# Altium PCB PCB2 - 副本.PcbDoc
Units mil, origin at the board's own origin, x right, y up, seen from the top; angles counter-clockwise.
Board outline 15000 x 6915 mil, 2 copper layers (Top Layer, Bottom Layer); 61 components, 138 nets, 441 pads, 73 vias.
Unrouted connection lines stored in the file: 80.
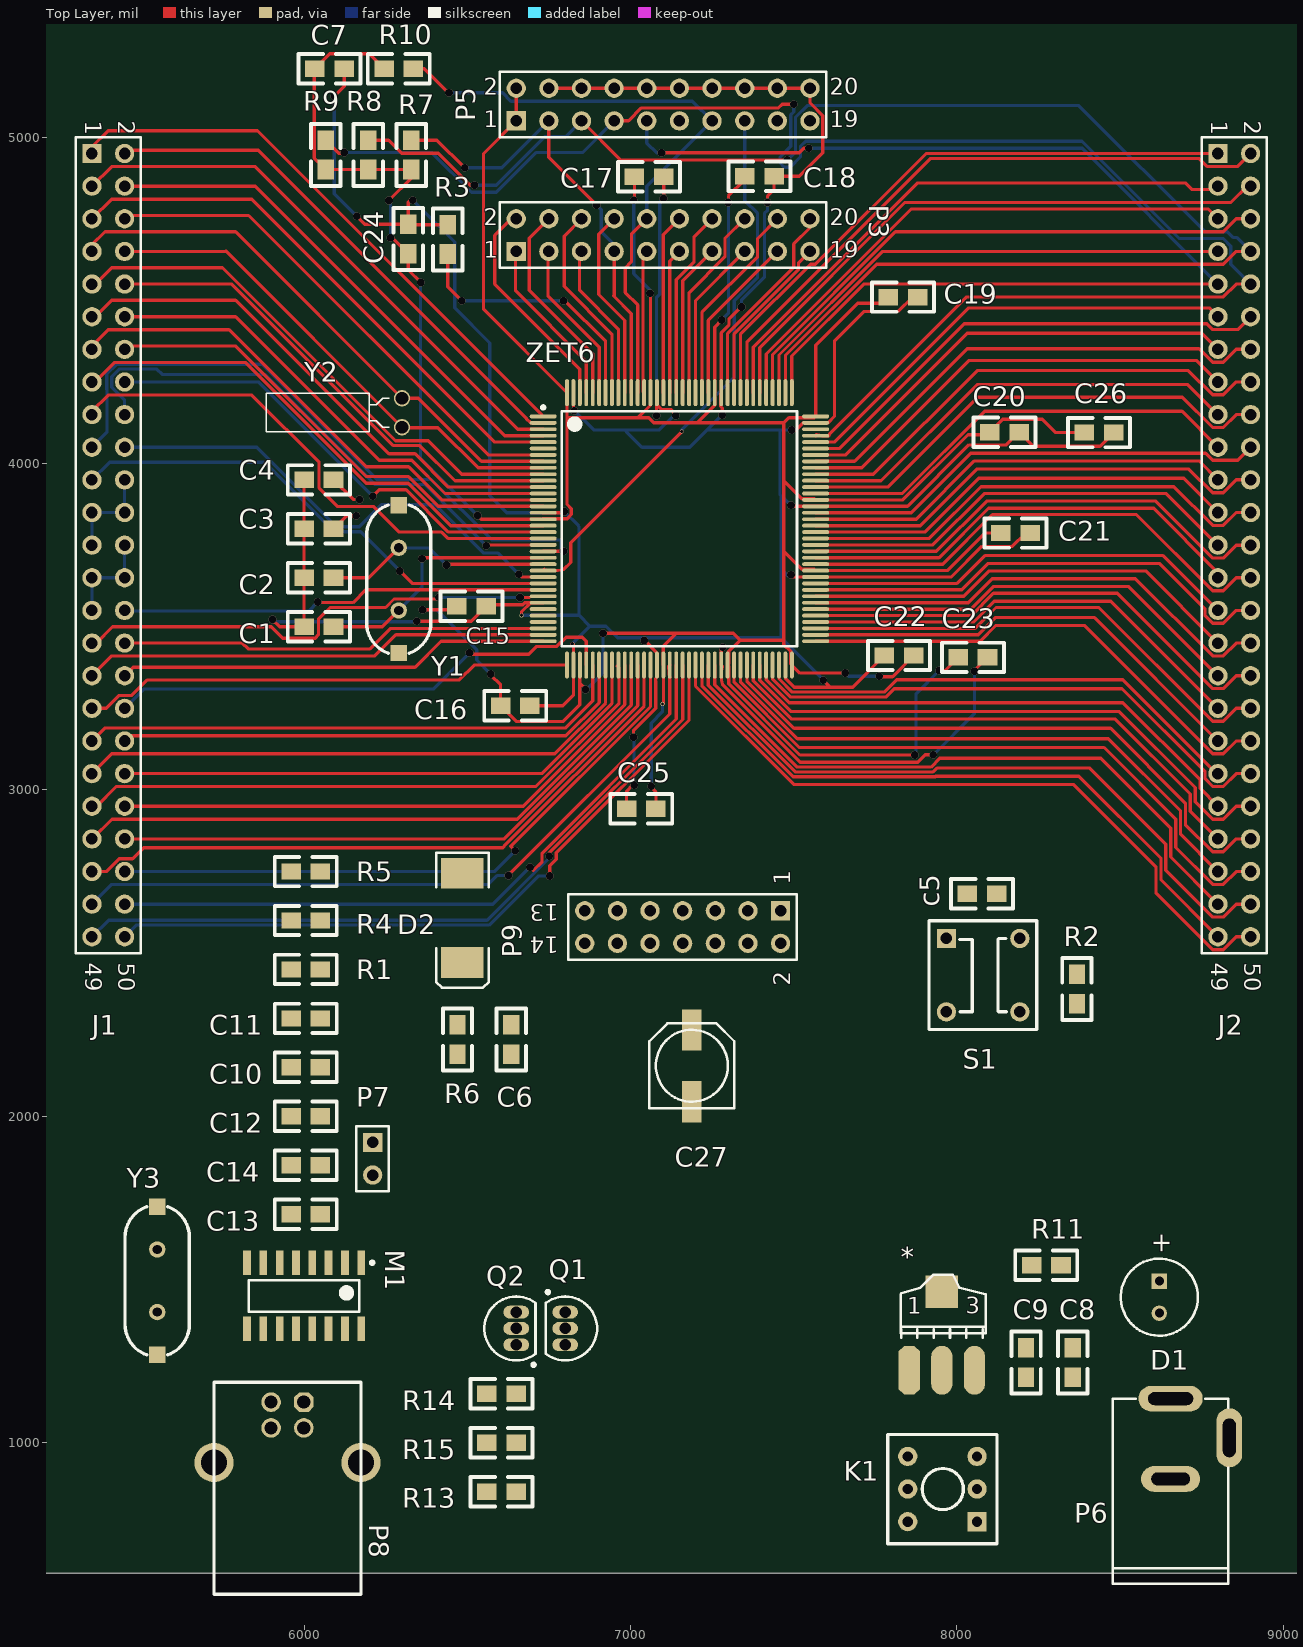
[diagram p0: Top Layer view]
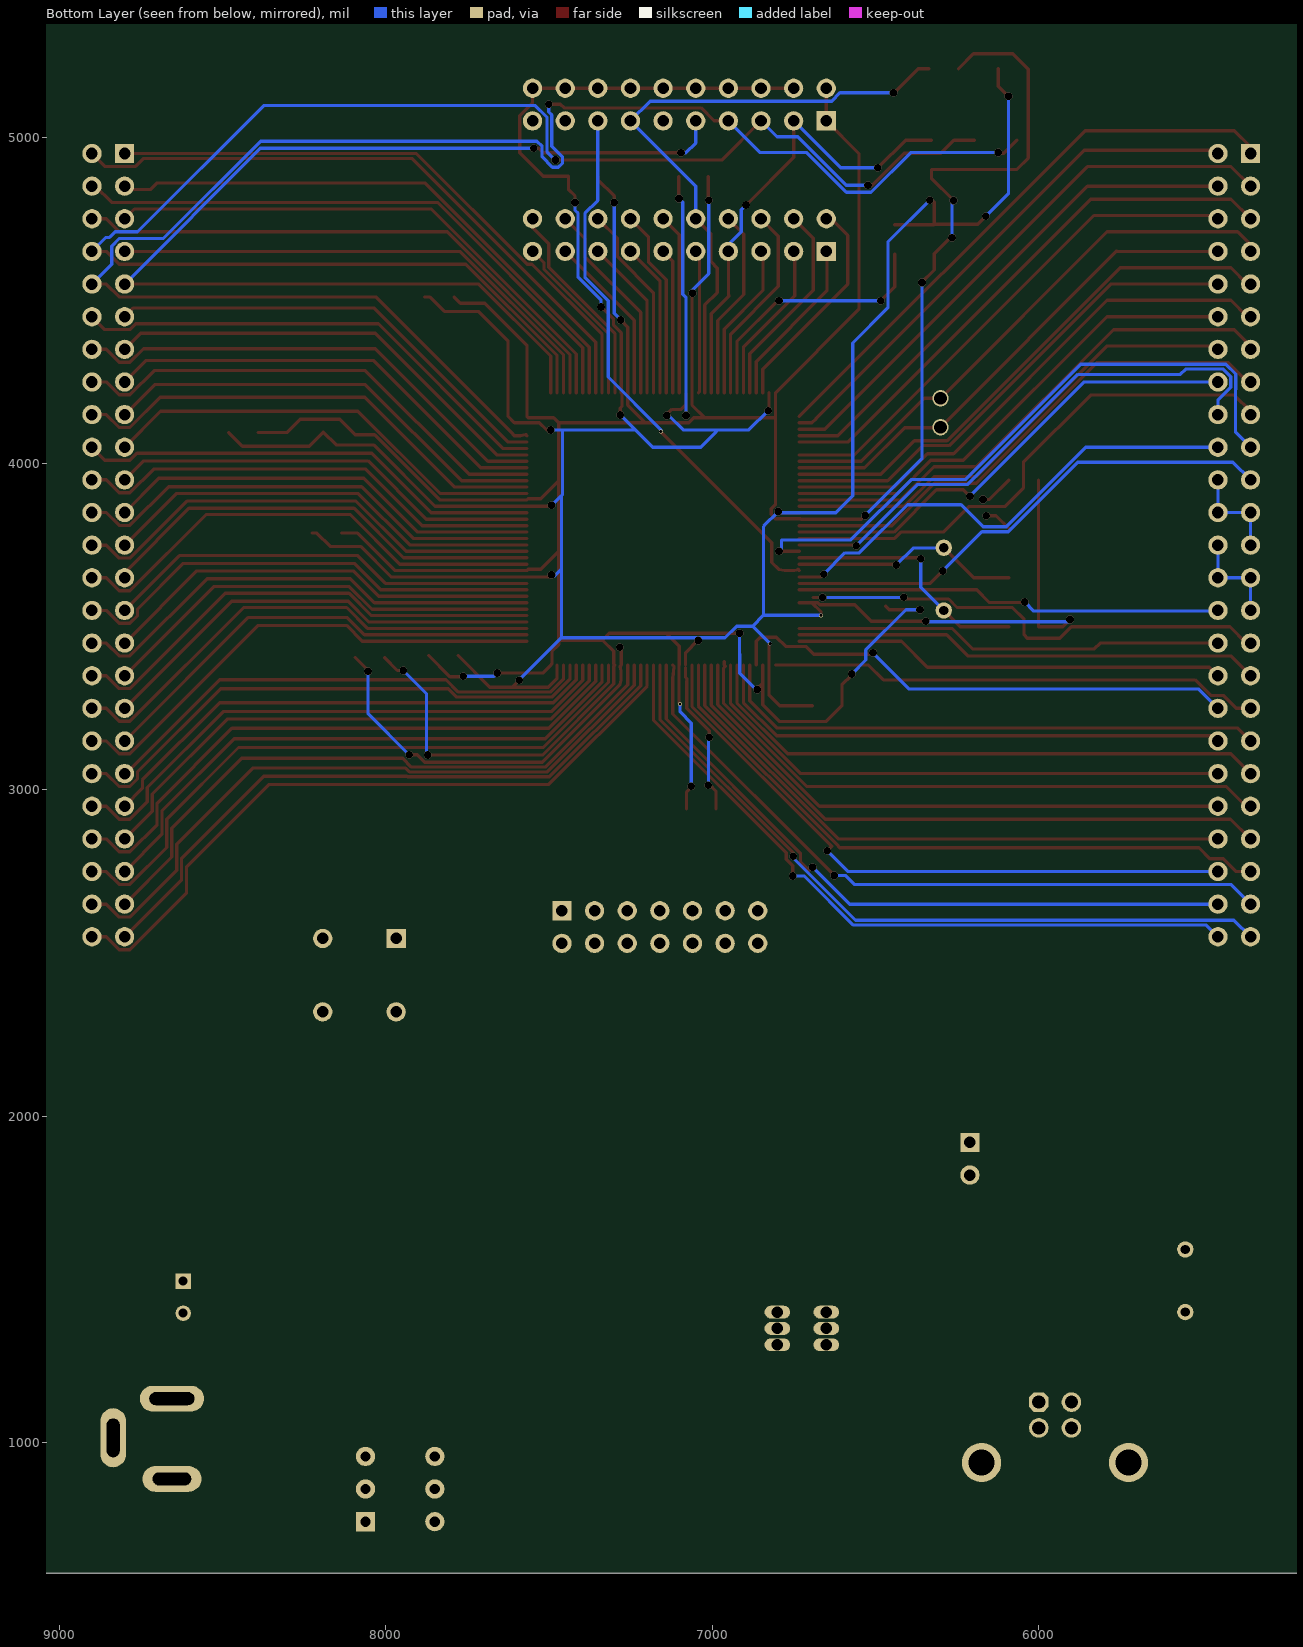
[diagram p1: Bottom Layer view, seen from below]

## Layer stack, top to bottom
Top Layer: signal copper 1.4
Dielectric: dielectric 12.6, FR-4, Dk 4.8
Bottom Layer: signal copper 1.4

## Board outline
35,7375 35,585 20,600 0,600 15000,600 15000,7500 0,7500

## Design rules (kind name [scope] priority, off if disabled: settings)
Clearance [All] p1: gap=5
PolygonConnect [All] p1: connectstyle=Relief reliefconductorwidth=10 reliefentries=4 polygonreliefangle="90 Angle" airgapwidth=10
RoutingVias [All] p1: holewidth=11 width=14 viastyle="Through Hole" minholewidth=10 minwidth=10 maxholewidth=28 maxwidth=50
SilkscreenOverComponentPads [All] p1: minsilkscreentomaskgap=10
SolderMaskExpansion [All] p1: expansion=4
Width [All] p1: maxlimit=10 minlimit=10 preferedwidth=10
27 further rules are at their usual default settings.

## Components (designator, comment, footprint, x,y, rotation, side; value= is the part's Value field where it differs from the comment)
* "ASM1117" AMS1117 7854,1222 r0 top
C1 "Cap" 0805 6000,3500 r0 top
C2 "Cap" 0805 6000,3650 r0 top
C3 "Cap" 0805 6000,3800 r0 top
C4 "Cap" 0805 6000,3950 r0 top
c5 "Cap" 0805 8122,2682 r180 top
C6 "Cap Semi" 0805 6634.94,2190 r90 top
C7 "Cap Semi" 0805 6123,5210 r180 top
C8 "Cap" 0805 8355,1201 r90 top
C9 "Cap" 0805 8212,1201 r90 top
C10 "Cap Semi" 0805 5960,2150 r0 top
C11 "Cap Semi" 0805 5960,2300 r0 top
C12 "Cap Semi" 0805 5960,2000 r0 top
C13 "Cap Semi" 0805 6050,1700 r180 top
C14 "Cap Semi" 0805 6050,1850 r180 top
C15 "Cap" 0805 6558,3563 r180 top
C16 "Cap" 0805 6692,3258 r180 top
C17 "Cap" 0805 7012,4879 r0 top
C18 "Cap" 0805 7440,4880 r180 top
C19 "Cap" 0805 7880,4510 r180 top
C20 "Cap" 0805 8191,4096 r180 top
C21 "Cap" 0805 8225,3787 r180 top
C22 "Cap" 0805 7778,3412 r0 top
C23 "Cap" 0805 8094,3406 r180 top
C24 "Cap" 0805 6319,4733 r270 top
C25 "Cap" 0805 6988,2942 r0 top
C26 "Cap" 0805 8481,4095 r180 top
C27 "Cap Pol1" CC6.56.5 7188,2155 r270 top
D1 "LED3" RB.1 8620,1495 r90 top
D2 "Diode" SMC 6485,2608 r270 top
J1 "Edge Con 50" HDR2X25 5350,4950 r270 top
J2 "Edge Con 50" HDR2X25 8800,4950 r270 top
K1 "BUTTON" BTN8.5*8.5 8062,758 r180 top
M1 "CH340" ch340 6000,1450 r270 top
P3 "Header 10X2H" HDR2X10 6650,4650 r0 top
P5 "download" HDR2X10 6650,5050 r0 top
P6 "PWR2.5" POWER_002 8655,1135 r0 top
P7 "Header 2" HDR1X2 6210,1920 r270 top
P8 "MiNiUSB" USB_B1 5999,1124 r270 top
P9 "Header 7X2" HDR2X7 7460,2630 r180 top
Q1 "2N3904" TO-92A 6800,1350 r180 top
Q2 "2N3904" TO-92A 6650,1350 r0 top
R1 "Res2" 0805 5960,2450 r0 top
R2 "Res2" 0805 8368,2345 r90 top
R3 "Res2" 0805 6440,4642 r90 top
R4 "Res2" 0805 5960,2600 r0 top
R5 "Res2" 0805 5960,2750 r0 top
R6 "Res2" 0805 6470,2190 r90 top
R7 "Res2" 0805 6328,4991 r270 top
R8 "Res2" 0805 6197,4991 r270 top
R9 "Res2" 0805 6066,4991 r270 top
R10 "Res2" 0805 6335,5210 r180 top
R11 "Res2" 0805 8229,1544 r0 top
R13 "Res2" 0805 6650,850 r180 top
R14 "Res2" 0805 6650,1150 r180 top
R15 "Res2" 0805 6650,1000 r180 top
S1 "SW-PB" key4 7968,2545 r270 top
Y1 "8MH" XTAL_US 6290,3550 r90 top
Y2 "32.76MH" XTAL4 6300,4200 r0 top
Y3 "12MHZ" XTAL_US 5550,1400 r90 top
ZET6 "MCU" LQFP144 7150,3800 r0 top

## Footprints (in the part's own frame and the unit in brackets; to place one, negate y for a bottom-side part, rotate by r counter-clockwise, add the part's x,y. Pads: shape width x height; smd on the part's side, far side on the other; paste and mask are expansions set on the pad)
0805 [mil]
  rect 60x50 smd: 1(0,-0.06) 2(90,-0.06)
  silkscreen extent -50,-45 140,45
AMS1117 [mil]
  oct 65x150 smd: 1(0.03,-0.06)
  oval 65x150 smd: 2(100.03,-0.06) 3(200.03,-0.06)
  rect 100x100 smd: 4(100.03,239.94)
  silkscreen extent -26,100 234,293
BTN8.5*8.5 [mm]
  rect 1.5x1.5 hole 0.8: 1(0,0)
  round 1.5 hole 0.8: 2(0,-2.54) 3(0,-5.08) 4(5.4,-5.08) 5(5.4,-2.54) 6(5.4,0)
  silkscreen extent -1.55,-6.79 6.95,1.71
CC6.56.5 [mm]
  rect 3.2x1.5 smd: 1(-2.794,0) 2(2.8,0)
  silkscreen extent -3.3,-3.3 3.3,3.3
ch340 [mm] "SOIC, 16-Leads, Body 8.6x4.0mm (max), Pitch 1.27mm, IPC Medium Density"
  rect 1.9x0.6 smd: 1(-2.575,4.445) 2(-2.575,3.175) 3(-2.575,1.905) 4(-2.575,0.635) 5(-2.575,-0.635) 6(-2.575,-1.905) 7(-2.575,-3.175) 8(-2.575,-4.445) 9(2.575,-4.445) 10(2.575,-3.175) 11(2.575,-1.905) 12(2.575,-0.635) 13(2.575,0.635) 14(2.575,1.905) 15(2.575,3.175) 16(2.575,4.445)
  silkscreen extent -2.7,-4.3 1.22,5.42, body extent -1.98,-4.28 1.97,4.28, height 1.7
HDR1X2 [mm] "Connector; Header; 2 Position"
  rect 1.5x1.5 hole 0.9: 1(0,0)
  round 1.5 hole 0.9: 2(2.54,0)
  silkscreen extent -1.27,-1.27 3.81,1.27
HDR2X7 [mm] "Connector; Header; 7x2 Position"
  rect 1.5x1.5 hole 0.9: 1(0,0)
  round 1.5 hole 0.9: 2(0,2.54) 3(2.54,0) 4(2.54,2.54) 5(5.08,0) 6(5.08,2.54) 7(7.62,0) 8(7.62,2.54) 9(10.16,0) 10(10.16,2.54) 11(12.7,0) 12(12.7,2.54) 13(15.24,0) 14(15.24,2.54)
  silkscreen extent -1.27,-1.27 16.51,3.81
HDR2X10 [mm] "Connector; Header; 10x2 Position"
  rect 1.5x1.5 hole 0.9: 1(0,0)
  round 1.5 hole 0.9: 2(0,2.54) 3(2.54,0) 4(2.54,2.54) 5(5.08,0) 6(5.08,2.54) 7(7.62,0) 8(7.62,2.54) 9(10.16,0) 10(10.16,2.54) 11(12.7,0) 12(12.7,2.54) 13(15.24,0) 14(15.24,2.54) 15(17.78,0) 16(17.78,2.54) 17(20.32,0) 18(20.32,2.54) 19(22.86,0) 20(22.86,2.54)
  silkscreen extent -1.27,-1.27 24.13,3.81
HDR2X25 [mm] "Connector; Header; 25x2 Position"
  rect 1.5x1.5 hole 0.9: 1(0,0)
  round 1.5 hole 0.9: 2(0,2.54) 3(2.54,0) 4(2.54,2.54) 5(5.08,0) 6(5.08,2.54) 7(7.62,0) 8(7.62,2.54) 9(10.16,0) 10(10.16,2.54) 11(12.7,0) 12(12.7,2.54) 13(15.24,0) 14(15.24,2.54) 15(17.78,0) 16(17.78,2.54) 17(20.32,0) 18(20.32,2.54) 19(22.86,0) 20(22.86,2.54) 21(25.4,0) 22(25.4,2.54) 23(27.94,0) 24(27.94,2.54) 25(30.48,0) 26(30.48,2.54) 27(33.02,0) 28(33.02,2.54) 29(35.56,0) 30(35.56,2.54) 31(38.1,0) 32(38.1,2.54) 33(40.64,0) 34(40.64,2.54) 35(43.18,0) 36(43.18,2.54) 37(45.72,0) 38(45.72,2.54) 39(48.26,0) 40(48.26,2.54) 41(50.8,0) 42(50.8,2.54) 43(53.34,0) 44(53.34,2.54) 45(55.88,0) 46(55.88,2.54) 47(58.42,0) 48(58.42,2.54) 49(60.96,0) 50(60.96,2.54)
  silkscreen extent -1.27,-1.27 62.23,3.81
key4 [mm]
  round 1.5 hole 0.9: 1(0,5.715) 3(5.715,0) 4(5.715,5.715)
  rect 1.5x1.5 hole 0.9: 2(0,0)
  silkscreen extent -1.37,-1.35 7.09,7.04
LQFP144 [mm] "144-Pin Thin Quad Flat Pack 0.5 mm Pitch, IPC Low Density"
  oval 2.1x0.3 smd: 1(-10.6,8.75) 2(-10.6,8.25) 3(-10.6,7.75) 4(-10.6,7.25) 5(-10.6,6.75) 6(-10.6,6.25) 7(-10.6,5.75) 8(-10.6,5.25) 9(-10.6,4.75) 10(-10.6,4.25) 11(-10.6,3.75) 12(-10.6,3.25) 13(-10.6,2.75) 14(-10.6,2.25) 15(-10.6,1.75) 16(-10.6,1.25) 17(-10.6,0.75) 18(-10.6,0.25) 19(-10.6,-0.25) 20(-10.6,-0.75) 21(-10.6,-1.25) 22(-10.6,-1.75) 23(-10.6,-2.25) 24(-10.6,-2.75) 25(-10.6,-3.25) 26(-10.6,-3.75) 27(-10.6,-4.25) 28(-10.6,-4.75) 29(-10.6,-5.25) 30(-10.6,-5.75) 31(-10.6,-6.25) 32(-10.6,-6.75) 33(-10.6,-7.25) 34(-10.6,-7.75) 35(-10.6,-8.25) 36(-10.6,-8.75) 73(10.6,-8.75) 74(10.6,-8.25) 75(10.6,-7.75) 76(10.6,-7.25) 77(10.6,-6.75) 78(10.6,-6.25) 79(10.6,-5.75) 80(10.6,-5.25) 81(10.6,-4.75) 82(10.6,-4.25) 83(10.6,-3.75) 84(10.6,-3.25) 85(10.6,-2.75) 86(10.6,-2.25) 87(10.6,-1.75) 88(10.6,-1.25) 89(10.6,-0.75) 90(10.6,-0.25) 91(10.6,0.25) 92(10.6,0.75) 93(10.6,1.25) 94(10.6,1.75) 95(10.6,2.25) 96(10.6,2.75) 97(10.6,3.25) 98(10.6,3.75) 99(10.6,4.25) 100(10.6,4.75) 101(10.6,5.25) 102(10.6,5.75) 103(10.6,6.25) 104(10.6,6.75) 105(10.6,7.25) 106(10.6,7.75) 107(10.6,8.25) 108(10.6,8.75)
  oval 0.3x2.1 smd: 37(-8.75,-10.6) 38(-8.25,-10.6) 39(-7.75,-10.6) 40(-7.25,-10.6) 41(-6.75,-10.6) 42(-6.25,-10.6) 43(-5.75,-10.6) 44(-5.25,-10.6) 45(-4.75,-10.6) 46(-4.25,-10.6) 47(-3.75,-10.6) 48(-3.25,-10.6) 49(-2.75,-10.6) 50(-2.25,-10.6) 51(-1.75,-10.6) 52(-1.25,-10.6) 53(-0.75,-10.6) 54(-0.25,-10.6) 55(0.25,-10.6) 56(0.75,-10.6) 57(1.25,-10.6) 58(1.75,-10.6) 59(2.25,-10.6) 60(2.75,-10.6) 61(3.25,-10.6) 62(3.75,-10.6) 63(4.25,-10.6) 64(4.75,-10.6) 65(5.25,-10.6) 66(5.75,-10.6) 67(6.25,-10.6) 68(6.75,-10.6) 69(7.25,-10.6) 70(7.75,-10.6) 71(8.25,-10.6) 72(8.75,-10.6) 109(8.75,10.6) 110(8.25,10.6) 111(7.75,10.6) 112(7.25,10.6) 113(6.75,10.6) 114(6.25,10.6) 115(5.75,10.6) 116(5.25,10.6) 117(4.75,10.6) 118(4.25,10.6) 119(3.75,10.6) 120(3.25,10.6) 121(2.75,10.6) 122(2.25,10.6) 123(1.75,10.6) 124(1.25,10.6) 125(0.75,10.6) 126(0.25,10.6) 127(-0.25,10.6) 128(-0.75,10.6) 129(-1.25,10.6) 130(-1.75,10.6) 131(-2.25,10.6) 132(-2.75,10.6) 133(-3.25,10.6) 134(-3.75,10.6) 135(-4.25,10.6) 136(-4.75,10.6) 137(-5.25,10.6) 138(-5.75,10.6) 139(-6.25,10.6) 140(-6.75,10.6) 141(-7.25,10.6) 142(-7.75,10.6) 143(-8.25,10.6) 144(-8.75,10.6)
  silkscreen extent -10.72,-9.15 9.15,9.57, body extent -10,-10 10,10, height 1.6
POWER_002 [mm]
  oval 5x2 hole 1 slot 3.5 at 0 deg: 1(0,0)
  oval 4.6x2 hole 1 slot 3 at 0 deg: 2(0,-6.25)
  oval 2x4.6 hole 1 slot 3 at 90 deg: 3(4.572,-3.048)
  silkscreen extent -4.5,-14.4 4.5,0, body extent -4.76,-13.66 4.75,0.17, height 11.02
RB.1 [mm]
  rect 1.2x1.2 hole 0.7: 1(0.001,-0.007)
  round 1.2 hole 0.7: 2(-2.499,-0.007)
  silkscreen extent -4.25,-3.01 1.75,2.99
SMC [mm] "DO-214-AB/SMC; 2 C-Bend Leads; Body 7.9 x 5.9 mm, inc. leads (LxW)"
  rect 2.4x3.3 smd: 1(-3.475,0) 2(3.475,0)
  silkscreen extent -5.07,-2.05 5.43,2.05
TO-92A [mm] "TO, Flat Index; 3 In-Line, Axial Leads; Body Dia. 4.5mm; Leads 0.51 x 0.48 mm (max)"
  oval 2x1 hole 0.9: 1(0,-1.27) 2(0,0) 3(0,1.27)
  silkscreen extent -2.48,-2.95 1.5,2.48, body extent -2.5,-2.5 1.5,2.5, height 6.86
USB_B1 [mil] "USB方?"
  oct 60x60 hole 40: 1(0,0)
  round 60 hole 40: 2(0,-100) 3(78.74,-100) 4(78.74,0)
  round 120 hole 80: 5(185.04,175) 6(185.04,-275)
  silkscreen extent -61,-275 589,175
XTAL4 [mm]
  round 1.27 hole 1: 1(0,0) 2(0,-2.25)
  silkscreen extent -10.55,-2.61 -1.01,0.39
XTAL_US [mil]
  round 50 hole 28: 1(0,0) 2(192.13,0)
  rect 50x50 smd: ""(-130.32,0) ""(322.44,0)
  silkscreen extent -131,-98 323,98

## Part data
C1 C2 C3 C4 c5 C8 C9 C15 C16 C17 C18 C19 C20 C21 C22 C23 C24 C25 C26: "Capacitor"
C6 C7 C10 C11 C12 C13 C14: "Capacitor (Semiconductor SIM Model)"
C27: "Polarized Capacitor (Radial)"
D1: "Typical BLUE SiC LED"
D2: "Default Diode"
J1 J2: "50-Pin Edge Connector"
P3: "Header, 10-Pin, Dual row, Right Angle"
P6: "Low Voltage Power Supply Connector"
P7: "Header, 2-Pin"
P8: library part "Header 6", "Header, 6-Pin"
P9: "Header, 7-Pin, Dual row"
Q1 Q2: "NPN General Purpose Amplifier"
R1 R2 R3 R4 R5 R6 R7 R8 R9 R10 R11 R13 R14 R15: "Resistor"
S1: "Switch"
Y1 Y2 Y3: library part XTAL, "Crystal Oscillator"
ZET6: library part Component_1

## Via types
v1: diameter 23.62, hole 23.62, Top Layer to Bottom Layer, 69 vias
v2: diameter 12, hole 10, Top Layer to Bottom Layer, 4 vias

## Nets (pads, with @x,y where several pads share a name; then routed paths per layer and width w, separated by ;. In a path a pad name is that pad's centre, name@x,y a point inside that pad or via, vN(x,y) a via of type N, cw(c..) or ccw(c..) an arc to the next point about the centre after c; other vN are vias at no path point)
BOOT0: R3.1 ZET6.138 | length 810.9
  Top Layer w10: R3.1 6440.06,4541.94 v1(6483,4499) ; v1(6795,4499) 6799,4499 6923.62,4374.38 ZET6.138
  Bottom Layer w10: v1(6483,4499) 6484,4498 6485,4499 v1(6795,4499)
BOOT1: Q1.1
NetC12_1: C12.1 M1.4
NetC13_2: C13.2 M1.8 Y3.1
NetC14_2: C14.2 M1.7 Y3.2
NetD1_1: D1.1 R11.2
NetD2_2: D2.2 Q2.3 R14.2
NetK1_1: K1.1 P6.1
NetM1_2: M1.2 P7.2
NetM1_3: M1.3 P7.1
NetM1_5: M1.5 P8.3
NetM1_6: M1.6 P8.2
NetM1_13: M1.13 R15.2
NetM1_14: M1.14 Q2.1 R13.2
NetP6_3: P6.3
NetQ1_2: Q1.2 R13.1
NetQ2_2: Q2.2 R15.1
NRST: c5.2 D2.1 P5.15 R2.1 S1.2 ZET6.25 | length 1702.2
  Top Layer w10: ZET6.25 6736.46,3675.83 6747.31,3672 6777,3672 6795.83,3675.83 6816.81,3696.81 6816.81,3757.81 v2(7157,4098)
  Bottom Layer w10: v2(7157,4098) 7157,4104 7318.19,4265.19 7318.19,4499.4 7389.53,4570.74 7389.53,4766.37 7350,4805.9 P5.15
OSC_IN: C1.2 Y1.1 ZET6.23 | length 781.2
  Top Layer w10: C1.2 6239.94,3499.94 Y1.1 ; v1(6361,3708) 6364.42,3711.42 ZET6.23
  Bottom Layer w10: Y1.1 6361,3621 v1(6361,3708)
OSC_OUT: C2.2 Y1.2 ZET6.24 | length 708
  Top Layer w10: C2.2 6197.81,3649.94 Y1.2 ; v1(6436,3689) 6436,3691.46 6435.73,3691.73 ZET6.24
  Bottom Layer w10: Y1.2 6291.12,3741 6384,3741 6435,3690 6437,3690 v1(6436,3689)
PA0: J1.32 ZET6.34 | length 1316.2
  Top Layer w10: J1.32 5811,3450 5829,3432 6202,3432 6264.88,3494.88 ZET6.34
PA1: J1.33 ZET6.35 | length 1434.5
  Top Layer w10: J1.33 5410.47,3410.47 6216.65,3410.47 6281.37,3475.2 ZET6.35
PA2: J1.34 P9.3 ZET6.36 | length 1326.4
  Top Layer w10: J1.34 5476,3376 6340,3376 6419.51,3455.51 ZET6.36
PA3: J1.35 P9.4 ZET6.37 | length 1510.5
  Top Layer w10: J1.35 5394.1,3250 5433.63,3289.53 5472.53,3289.53 5520,3337 6475,3337 6520.68,3382.68 ZET6.37
PA4: J1.36 ZET6.40 | length 1588.4
  Top Layer w10: v1(6507,3420) 6507,3416 6689,3416 6712.61,3439.61 6774.7,3439.61 6803,3467.91 6852.09,3467.91 6864.57,3455.43 ZET6.40
  Bottom Layer w10: J1.36 5509,3309 6396,3309 v1(6507,3420)
PA5: J1.37 ZET6.41 | length 1694.7
  Top Layer w10: J1.37 5389.53,3189.53 6800.53,3189.53 6884.25,3273.25 ZET6.41
PA6: J1.38 ZET6.42 | length 1617.7
  Top Layer w10: J1.38 5466,3166 6802.29,3166 6903.94,3267.64 ZET6.42
PA7: J1.39 ZET6.43 | length 1779.7
  Top Layer w10: J1.39 5410.47,3110.47 6767.98,3110.47 6923.62,3266.11 ZET6.43
PA8: J2.15 ZET6.100 | length 1396.3
  Top Layer w10: ZET6.100 7709.01,3987.01 8038,4316 8734,4316 J2.15
PA9: J2.14 P9.1 ZET6.101 | length 1509.3
  Top Layer w10: ZET6.101 7686.69,4006.69 8032,4352 8742.1,4352 8783.63,4310.47 8816.37,4310.47 8855.9,4350 J2.14
PA10: J2.13 P9.2 ZET6.102 | length 1407.3
  Top Layer w10: ZET6.102 7659.38,4026.38 8032,4399 8751,4399 J2.13
PA11: J2.12 ZET6.103 | length 1514.5
  Top Layer w10: ZET6.103 7640.06,4046.06 8022,4428 8766.1,4428 8783.63,4410.47 8860.47,4410.47 J2.12
PA12: J2.11 ZET6.104 | length 1414.2
  Top Layer w10: ZET6.104 7624.75,4065.75 8036,4477 8773,4477 J2.11
PA13: J2.10 P5.7 R9.1 ZET6.105 | length 5051.9
  Top Layer w10: R9.1 6105.93,4951 6121,4951 v1(6123,4953) ; P5.7 6994.1,5050 7033.63,5089.53 7453.53,5089.53 7465,5101 v1(7500,5101) ; ZET6.105 7571.1,4089.21 7588,4085 7607.12,4085 7609.34,4089.21 8030.6,4510.47 8816.37,4510.47 8855.9,4550 J2.10
  Bottom Layer w10: v1(6123,4953) 6391.15,4953 6512.97,4831.19 6588.4,4831.19 6710.21,4953 6853,4953 P5.7 ; v1(7500,5101) 7500,5077.11 7491,5068.11 7491,4971.85 7458.19,4939.03 7458.19,4920.97 7470.97,4908.19 7489.03,4908.19 7521,4940.15 7521,4971.85 7536.97,4987.81 8383.4,4987.81 8681.69,4689.53 8816.37,4689.53 8839.53,4666.37 8839.53,4610.47 J2.10
PA14: J2.9 P5.9 ZET6.109 | length 3517.6
  Top Layer w10: v1(7095,4952) 7517,4952 7531,4966 v1(7546,4966) ; ZET6.109 7494.49,4329.64 7714.85,4550 J2.9
  Bottom Layer w10: P5.9 7050,4982 7080,4952 v1(7095,4952) ; v1(7546,4966) 8384,4966 J2.9
PA15: J2.8 P5.5 R8.1 ZET6.110 | length 4879
  Top Layer w10: R8.1 6258.79,4991 6298.79,4951 6411,4951 6509,4853 v1(6522,4853) ; P5.5 6970,4930 v1(7480,4930) ; ZET6.110 7474.8,4331.16 7754.11,4610.47 8816.37,4610.47 8855.9,4650 J2.8
  Bottom Layer w10: v1(6522,4853) 6589,4853 6737,5001 6801,5001 P5.5 ; v1(7480,4930) 7506,4956 7506,5061.9 7541.1,5097 8373.94,5097 8760.47,4710.47 8828.53,4710.47 8846,4693 8857,4693 J2.8
PB0: J1.42 ZET6.46 | length 1782.9
  Top Layer w10: J1.42 6671.15,2950 6982.68,3261.53 ZET6.46
PB1: J1.43 ZET6.47 | length 1944.9
  Top Layer w10: J1.43 5351,2850 5411.47,2910.47 6652.83,2910.47 7002.36,3260 ZET6.47
PB2: J1.44 R1.1 ZET6.48 | length 1865.4
  Top Layer w10: J1.44 6613.57,2850 7022.05,3258.47 ZET6.48
PB3: P3.10 P5.13 R10.1 ZET6.133 | length 1939.9
  Top Layer w10: R10.1 6367.94,5210.06 6442,5136 v1(6444,5136) ; ZET6.133 7022.05,4485.95 6984,4524 6984,4599 7003,4618 7003,4703 P3.10
  Bottom Layer w10: v1(6444,5136) 6608.1,5136 6633.63,5110.47 7189.53,5110.47 P5.13 7050,4850 P3.10
PB4: P3.7 P5.3 R7.1 ZET6.134 | length 1455.8
  Top Layer w10: R7.1 6407,4991 v1(6492,4906) ; P5.3 6750,4938 v1(6896,4792) ; P3.7 6950,4516 6948,4514 7002.36,4459.64 ZET6.134
  Bottom Layer w10: v1(6492,4906) 6606,4906 P5.3 ; v1(6896,4792) 6910.47,4777.53 6910.47,4710.47 6950,4670.94 P3.7
PB5: P3.8 ZET6.135 | length 585.1
  Top Layer w10: P3.8 6903,4703 6903,4518 6982.68,4438.32 ZET6.135
PB6: P3.5 ZET6.136 | length 484.5
  Top Layer w10: P3.5 6844,4644 6844,4531 6962.99,4412.01 ZET6.136
PB7: P3.6 ZET6.137 | length 615.2
  Top Layer w10: P3.6 6797,4697 6797,4543 6943.31,4396.69 ZET6.137
PB8: P3.3 ZET6.139 | length 498.9
  Top Layer w10: P3.3 6747,4647 6747,4514 6903.94,4357.06 ZET6.139
PB9: P3.4 ZET6.140 | length 638
  Top Layer w10: P3.4 6690,4690 6690,4531 6884.25,4336.75 ZET6.140
PB10: J2.40 P9.5 ZET6.69 | length 1694.2
  Top Layer w10: ZET6.69 7435.43,3339.14 7489.57,3285 7783.49,3285 7808.49,3310 8506,3310 8760.47,3055.53 8760.47,3033.63 8783.63,3010.47 8816.37,3010.47 8855.9,3050 J2.40
PB11: J2.39 P9.6 ZET6.70 | length 1538.8
  Top Layer w10: ZET6.70 7455.12,3340.67 7495.79,3300 7777.28,3300 7815.28,3338 8509,3338 8797,3050 J2.39
PB12: J2.38 ZET6.73 | length 1532.1
  Top Layer w10: ZET6.73 8071.51,3455.51 8120,3504 8390.1,3504 8783.63,3110.47 8816.37,3110.47 8855.9,3150 J2.38
PB13: J2.37 ZET6.74 | length 1411.1
  Top Layer w10: ZET6.74 8065.2,3475.2 8118,3528 8422,3528 J2.37
PB14: J2.36 ZET6.75 | length 1520
  Top Layer w10: ZET6.75 8055.88,3494.88 8120,3559 8435.1,3559 8783.63,3210.47 8816.37,3210.47 8855.9,3250 J2.36
PB15: J2.35 ZET6.76 | length 1394.8
  Top Layer w10: ZET6.76 8051.57,3514.57 8115,3578 8472,3578 J2.35
PC0: J1.20 ZET6.26 | length 1503.7
  Top Layer w10: v1(6658,3661) 6666.64,3652.36 ZET6.26
  Bottom Layer w10: J1.20 5855,4050 6099,3806 6169,3806 6237,3874 6401.15,3874 6548.97,3726.19 6592.81,3726.19 v1(6658,3661)
PC1: J1.21 ZET6.27 | length 1558.9
  Top Layer w10: v1(6293,3671) 6331.32,3632.68 ZET6.27
  Bottom Layer w10: J1.21 5404,4004 5879.79,4004 6092.79,3791 6173,3791 v1(6293,3671)
PC2: J1.30 ZET6.28 | length 1312.1
  Top Layer w10: v1(6042,3576) 6044,3574 6150,3574 6188.99,3612.99 ZET6.28
  Bottom Layer w10: J1.30 5452,3548 6014,3548 v1(6042,3576)
PC3: J1.31 ZET6.29 | length 1456.2
  Top Layer w10: J1.31 5363,3450 5413,3500 5899,3500 5934.06,3464.94 6034.14,3464.94 6044,3474.79 6044,3523.08 6079.92,3559 6249.5,3559 6275.5,3585 6408,3585 v1(6413,3590) ; v1(6661.47,3589.53) 6690.66,3589.53
  Bottom Layer w10: v1(6413,3590) 6413.06,3590 6413.53,3589.53 v1(6661.47,3589.53)
PC4: J1.40 ZET6.44 | length 1700.3
  Top Layer w10: J1.40 6728.72,3050 6943.31,3264.59 ZET6.44
PC5: J1.41 ZET6.45 | length 1877.4
  Top Layer w10: J1.41 5364,2950 5424.47,3010.47 6710.41,3010.47 6965,3265.07 6965,3373.11 6959.21,3378.9 ZET6.45 ZET6.45@6963,3393
PC6: J2.19 ZET6.96 | length 1382.5
  Top Layer w10: ZET6.96 7833.27,3908.27 8085,4160 8690,4160 J2.19
PC7: J2.18 ZET6.97 | length 1501.3
  Top Layer w10: ZET6.97 7788.95,3927.95 8064,4203 8691.1,4203 8783.63,4110.47 8816.37,4110.47 8855.9,4150 J2.18
PC8: J2.17 ZET6.98 | length 1392.7
  Top Layer w10: ZET6.98 7767.64,3947.64 8062,4242 8708,4242 J2.17
PC9: J2.16 ZET6.99 | length 1511.5
  Top Layer w10: ZET6.99 7744.32,3967.32 8062,4285 8709.1,4285 8783.63,4210.47 8816.37,4210.47 8855.9,4250 J2.16
PC10: J2.7 P9.7 ZET6.111 | length 1591.7
  Top Layer w10: ZET6.111 7455.12,4332.69 7772.43,4650 J2.7
PC11: J2.6 P9.8 ZET6.112 | length 1753.7
  Top Layer w10: ZET6.112 7435.43,4334.22 7811.69,4710.47 8816.37,4710.47 8855.9,4750 J2.6
PC12: J2.5 P9.9 ZET6.113 | length 1699.1
  Top Layer w10: ZET6.113 7415.75,4335.75 7860,4780 8770,4780 J2.5
PC13: J1.6 ZET6.7 | length 1576.6
  Top Layer w10: J1.6@5460,4760 5830,4760 6563.62,4026.38 ZET6.7
PC14: C3.2 J1.7 Y2.1 ZET6.8 | length 1797.2
  Top Layer w10: J1.7 5350,4670 5390,4710 5790,4710 Y2.1 6350,4200 6543.31,4006.69 ZET6.8 ; C3.2 6130.07,3840 v1(6160,3840)
PC15: C4.2 J1.8 Y2.2 ZET6.9 | length 1679.1
  Top Layer w10: J1.8 5760,4650 5760,4651.42 Y2.2 6301.42,4110 6410,4110 6532.99,3987.01 ZET6.9 ; C4.2 6149.94,3890 v1(6170,3890)
  Bottom Layer w10: v1(6170,3890) v1@6170,3890.85 ; Y2.2@6290,4101.42 Y2.2
PD0: J2.4 ZET6.114 | length 1846.6
  Top Layer w10: ZET6.114 7396.06,4354.85 7841.21,4800 8840,4800 8890,4850 J2.4
PD1: J2.3 ZET6.115 | length 1783.7
  Top Layer w10: ZET6.115 7376.38,4356.38 7880,4860 8700,4860 8720,4840 8790,4840 J2.3
PD2: J2.2 P9.10 ZET6.116 | length 1957.5
  Top Layer w10: ZET6.116 7356.69,4371.69 7920,4935 8741.8,4935 8766.33,4910.47 8860.47,4910.47 J2.2
PD3: J2.1 ZET6.117 | length 1871
  Top Layer w10: ZET6.117 7337.01,4395.79 7551.69,4610.47 7566.37,4610.47 7905.9,4950 J2.1
PD4: P3.19 ZET6.118 | length 529.1
  Top Layer w10: ZET6.118 7317.32,4397.32 7515,4595 7515,4615 P3.19
PD5: P3.20 ZET6.119 | length 637.2
  Top Layer w10: ZET6.119 7297.64,4398.85 7500,4601.21 7500,4673 7550,4723 P3.20
PD6: P3.17 ZET6.122 | length 520.2
  Top Layer w10: ZET6.122 7238.58,4438.58 P3.17
PD7: P3.18 ZET6.123 | length 628.4
  Top Layer w10: ZET6.123 7218.9,4463 7389.53,4633.63 7389.53,4689.53 P3.18
PD8: J2.34 ZET6.77 | length 1498.6
  Top Layer w10: ZET6.77 8043.47,3534.25 8112.11,3602.89 8491.21,3602.89 8783.63,3310.47 8816.37,3310.47 8855.9,3350 J2.34
PD9: J2.33 ZET6.78 | length 1374.4
  Top Layer w10: ZET6.78 8041.94,3553.94 8111,3623 8527,3623 J2.33
PD10: J2.32 ZET6.79 | length 1477.4
  Top Layer w10: ZET6.79 8034.62,3573.62 8108,3647 8547.1,3647 8783.63,3410.47 8816.37,3410.47 8855.9,3450 J2.32
PD11: J2.31 ZET6.80 | length 1356.4
  Top Layer w10: ZET6.80 8021.31,3593.31 8099,3671 8579,3671 J2.31
PD12: J2.30 ZET6.81 | length 1470.3
  Top Layer w10: ZET6.81 8014.99,3612.99 8096,3694 8620,3694 8760.47,3553.53 8760.47,3533.63 8783.63,3510.47 8816.37,3510.47 8855.9,3550 J2.30
PD13: J2.29 ZET6.82 | length 1337.6
  Top Layer w10: ZET6.82 8000.68,3632.68 8086,3718 8632,3718 J2.29
PD14: J2.28 ZET6.85 | length 1508.9
  Top Layer w10: ZET6.85 7956.73,3691.73 8109,3844 8550.1,3844 8783.63,3610.47 8816.37,3610.47 8855.9,3650 J2.28
PD15: J2.27 ZET6.86 | length 1393.1
  Top Layer w10: ZET6.86 7945.42,3711.42 8097,3863 8603,3863 8800,3666 J2.27
PE0: P3.1 ZET6.141 | length 523.2
  Top Layer w10: P3.1 6648,4648 6648,4529 6864.57,4312.43 ZET6.141
PE1: P3.2 ZET6.142 | length 676.9
  Top Layer w10: P3.2 6635,4750 6584,4699 6584,4550 6844.88,4289.12 ZET6.142
PE2: J1.1 ZET6.1 | length 1786
  Top Layer w10: J1.1 5350,4970 5400,5020 5857.17,5020 ZET6.1
PE3: J1.2 ZET6.2 | length 1633.2
  Top Layer w10: J1.2 5460,4960 5860,4960 6681.34,4138.66 6681.34,4137.9 6694.44,4124.8 ZET6.2
PE4: J1.3 ZET6.3 | length 1740.9
  Top Layer w10: J1.3 5410,4910 5850,4910 6654.88,4105.12 ZET6.3
PE5: J1.4 ZET6.4 | length 1599.4
  Top Layer w10: J1.4 5850,4850 6614.57,4085.43 ZET6.4
PE6: J1.5 ZET6.5 | length 1715.8
  Top Layer w10: J1.5 5410,4810 5840,4810 6584.25,4065.75 ZET6.5
PE7: J2.49 ZET6.58 | length 2003.1
  Top Layer w10: ZET6.58 7218.9,3319.63 7498.33,3040.19 7933.46,3040.19 7935.27,3042 8374,3042 8625.47,2790.53 8625.47,2724.53 J2.49
PE8: J2.48 ZET6.59 | length 2090.3
  Top Layer w10: ZET6.59 7238.58,3321.15 7504.55,3055.19 7927.25,3055.19 7939.06,3067 8407,3067 8640.47,2833.53 8640.47,2753.63 8783.63,2610.47 8816.37,2610.47 8855.9,2650 J2.48
PE9: J2.47 ZET6.60 | length 1954.1
  Top Layer w10: ZET6.60 7258.27,3322.68 7510.76,3070.19 7921.03,3070.19 7947.85,3097 8441,3097 8655.47,2882.53 8655.47,2794.53 J2.47
PE10: J2.46 ZET6.63 | length 1959.3
  Top Layer w10: ZET6.63 7317.32,3329.97 7517.29,3130 8451,3130 8670.47,2910.53 8670.47,2823.63 8783.63,2710.47 8816.37,2710.47 8855.9,2750 J2.46
PE11: J2.45 ZET6.64 | length 1796.6
  Top Layer w10: ZET6.64 7337.01,3331.5 7511.51,3157 8464,3157 8685.47,2935.53 8685.47,2864.53 J2.45
PE12: J2.44 ZET6.65 | length 1864.4
  Top Layer w10: ZET6.65 7356.69,3333.03 7500.72,3189 8471,3189 8700.47,2959.53 8700.47,2893.63 8783.63,2810.47 8816.37,2810.47 8855.9,2850 J2.44
PE13: J2.43 ZET6.66 | length 1703.5
  Top Layer w10: ZET6.66 7376.38,3334.56 7493.93,3217 8486,3217 8715.47,2987.53 8715.47,2934.53 J2.43
PE14: J2.42 ZET6.67 | length 1768.9
  Top Layer w10: ZET6.67 7396.06,3336.08 7492.15,3240 8498,3240 8730.47,3007.53 8730.47,2963.63 8783.63,2910.47 8816.37,2910.47 8855.9,2950 J2.42
PE15: J2.41 ZET6.68 | length 1605.1
  Top Layer w10: ZET6.68 7415.75,3337.61 7486.36,3267 8509,3267 8745.47,3030.53 8745.47,3004.53 J2.41
PF0: J1.9 ZET6.10 | length 1665.5
  Top Layer w10: J1.9 5360,4550 5410,4600 5750,4600 6280,4070 6380,4070 6482.68,3967.32 ZET6.10
PF1: J1.10 ZET6.11 | length 1532.2
  Top Layer w10: J1.10 5778.79,4550 6273.79,4055 6355,4055 6462.36,3947.64 ZET6.11
PF2: J1.11 ZET6.12 | length 1640.3
  Top Layer w10: J1.11 5360,4450 5410,4500 5790,4500 6260,4030 6340,4030 6442.05,3927.95 ZET6.12
PF3: J1.12 ZET6.13 | length 1507.1
  Top Layer w10: J1.12 5790,4450 6230,4010 6330,4010 6431.73,3908.27 ZET6.13
PF4: J1.13 ZET6.14 | length 1629.4
  Top Layer w10: J1.13 5350,4360 5400,4410 5770,4410 6190,3990 6320,3990 6421.42,3888.58 ZET6.14
PF5: J1.14 ZET6.15 | length 1490.2
  Top Layer w10: J1.14 5460,4360 5791.21,4360 6191.21,3960 6320,3960 6411.1,3868.9 ZET6.15
PF6: J1.15 ZET6.18 | length 1614.7
  Top Layer w10: J1.15 5360,4250 5420,4310 5820,4310 6190,3940 6318.79,3940 6448.94,3809.84 ZET6.18
PF7: J1.16 ZET6.19 | length 1489.7
  Top Layer w10: v1(6210,3900) 6230,3920 6312.44,3920 6442.28,3790.16 ZET6.19
  Bottom Layer w10: J1.16 5860,4250 v1(6210,3900)
PF8: J1.17 ZET6.20 | length 1641.8
  Top Layer w10: J1.17 5350,4160 5400,4210 5840,4210 6046,4004 6046,3924.79 6102.6,3868.19 6213.43,3868.19 6291.62,3790 6421.23,3790 6440.75,3770.47 ZET6.20
PF9: J1.18 ZET6.21 | length 1690.3
  Top Layer w10: v1(6558,3748) 6558,3748.57 6560.21,3750.79 ZET6.21
  Bottom Layer w10: J1.18 5450,4194.1 5410.47,4233.63 5410.47,4266.37 5433.63,4289.53 5548.47,4289.53 5565,4273 5879,4273 6216,3936 6370,3936 v1(6558,3748)
PF10: J1.19 ZET6.22 | length 1971.5
  Top Layer w10: ZET6.22 6794.9,3731.1 v1(6795,3731)
  Bottom Layer w10: J1.19 5396,4096 5396,4226.36 5395.47,4226.89 5395.47,4274.47 5425.53,4304.53 5554.69,4304.53 5555.21,4304 5871,4304 6224,3951 6390,3951 6575,3766 6787,3766 6787,3739 v1(6795,3731)
PF11: J1.45 ZET6.49 | length 2027.9
  Top Layer w10: J1.45 5394.1,2750 5433.63,2789.53 5474.53,2789.53 5508,2823 6608.49,2823 6618.5,2833.01 6618.5,2833.71 7041.73,3256.95 ZET6.49
PF12: J1.46 ZET6.50 | length 1975
  Top Layer w10: v1(6647,2814) 6633.5,2827.5 7061.42,3255.42 ZET6.50
  Bottom Layer w10: J1.46 6583,2750 v1(6647,2814)
PF13: J1.47 ZET6.53 | length 2163.8
  Top Layer w10: v1(6626,2738) 7120.69,3232.69 7120.69,3341.35 7116.69,3378.9 ZET6.53
  Bottom Layer w10: J1.47 5410.47,2710.47 6564.69,2710.47 6592.21,2738 v1(6626,2738)
PF14: J1.48 ZET6.54 | length 2114.2
  Top Layer w10: v1(6692,2763.32) 6702.16,2753.16 6729.19,2780.19 6729.19,2806.4 7140.16,3217.37 ZET6.54
  Bottom Layer w10: J1.48 6578.69,2650 v1(6692,2763.32)
PF15: J1.49 ZET6.55 | length 2261.6
  Top Layer w10: v1(6751,2797) 6751,2807 7159.84,3215.84 ZET6.55
  Bottom Layer w10: J1.49 5401,2601 6560.53,2601 6751,2791.47 v1(6751,2797)
PG0: J1.50 ZET6.56 | length 2203.4
  Top Layer w10: v1(6753,2736) 6753,2768.15 6772.81,2787.97 6772.81,2807.6 7179.53,3214.31 ZET6.56
  Bottom Layer w10: J1.50 5486,2586 6566.74,2586 6716.74,2736 v1(6753,2736)
PG1: J2.50 ZET6.57 | length 2163.1
  Top Layer w10: ZET6.57 7199.21,3318.1 7500.31,3017 8357,3017 8610.47,2763.53 8610.47,2683.63 8783.63,2510.47 8816.37,2510.47 8855.9,2550 J2.50
PG2: J2.26 ZET6.87 | length 1485.1
  Top Layer w10: ZET6.87 7937.1,3731.1 8091,3885 8609.1,3885 8783.63,3710.47 8816.37,3710.47 8855.9,3750 J2.26
PG3: J2.25 ZET6.88 | length 1363.2
  Top Layer w10: ZET6.88 7926.79,3750.79 8084,3908 8642,3908 J2.25
PG4: J2.24 ZET6.89 | length 1463.8
  Top Layer w10: ZET6.89 7915.47,3770.47 8074,3929 8665.1,3929 8783.63,3810.47 8816.37,3810.47 8855.9,3850 J2.24
PG5: J2.23 ZET6.90 | length 1344.4
  Top Layer w10: ZET6.90 7902.16,3790.16 8067,3955 8695,3955 J2.23
PG6: J2.22 ZET6.91 | length 1450.8
  Top Layer w10: ZET6.91 7887.84,3809.84 8061,3983 8711.1,3983 8783.63,3910.47 8816.37,3910.47 8855.9,3950 J2.22
PG7: J2.21 ZET6.92 | length 1330.6
  Top Layer w10: ZET6.92 7875.53,3829.53 8054,4008 8742,4008 J2.21
PG8: J2.20 ZET6.93 | length 1433.7
  Top Layer w10: ZET6.93 7860.21,3849.21 8043,4032 8762.1,4032 8783.63,4010.47 8860.47,4010.47 J2.20
PG9: P3.15 ZET6.124 | length 495.1
  Top Layer w10: ZET6.124 7199.21,4499.21 P3.15
PG10: P3.16 ZET6.125 | length 603.3
  Top Layer w10: ZET6.125 7179.53,4523.63 7289.53,4633.63 7289.53,4689.53 P3.16
PG11: P3.13 ZET6.126 | length 470
  Top Layer w10: ZET6.126 7159.84,4559.84 P3.13
PG12: P3.14 ZET6.127 | length 578.2
  Top Layer w10: ZET6.127 7140.16,4563.16 7195,4618 7195,4695 P3.14
PG13: P3.11 ZET6.128 | length 444.9
  Top Layer w10: ZET6.128 7120.47,4620.47 P3.11
PG14: P3.12 ZET6.129 | length 553.1
  Top Layer w10: ZET6.129 7100.79,4700.79 P3.12
PG15: P3.9 ZET6.132 | length 439
  Top Layer w10: ZET6.132 7038.19,4220.87 7038.19,4638.19 P3.9
VCC: *.3 C9.2 C10.1 C11.1 J1.22 J1.23 J1.24 J1.25 K1.3 M1.16 P8.1 R11.1 | length 300
  Bottom Layer w10: J1.25 J1.23 J1.24 J1.22
VDD_1: *.2 *.4 C6.2 C7.2 C8.2 C15.2 C16.2 C17.1 C18.2 C19.2 C20.2 C21.2 C22.2 C23.2 C24.2 C25.2 C26.2 C27.1 P5.1 P5.2 P9.11 P9.13 Q1.3 R2.2 R4.1 R5.1 R7.2 R8.2 R9.2 R10.2 R14.1 ZET6.17 ZET6.39 ZET6.52 ZET6.62 ZET6.72 ZET6.84 ZET6.95 ZET6.108 ZET6.121 ZET6.131 ZET6.144 | length 13119.6
  Top Layer w10: R10.2 6199.06,5256 6078.93,5256 C7.2 6030.94,5208 6030.94,4936 R9.2 R8.2 R7.2 6327.94,4873.94 v1(6260,4806) ; v1(6265,4692) 6269.93,4692 C24.2 6318.94,4593.06 v1(6357,4555) ; v1(6363,3552) 6456.93,3552 C15.2 ; v1(6531,3841) 6543,3829 6727,3829 6729.19,3831.19 6806.03,3831.19 6818.81,3843.97 6818.81,3862.03 6805.51,3875.33 ZET6.144 6550,4472.83 6550,4950 P5.1 P5.2 ; v1(6572,3355) 6572,3352 6602,3322 C16.2 6650.06,3210 6794,3210 6844.88,3260.88 6844.88,3327.12 ; 6805.51,4140 7022.34,4140 ; ZET6.39 6844.88,3327.12 ; v1(6862,3308) 6864,3308 6844.88,3327.12 ; v1(6916,3480) 7314.72,3480 7335.72,3459 ; v1(7010,4807) 7012,4809 C17.1 ; v1(7060,4522) 7061.42,4523.42 ZET6.131 7061.42,4179.08 7022.34,4140 ; v1(7064,3011) 7064,3008 7078,2994 C25.2 ; v2(7098,3263) 7101,3266 7101,3382.46 ZET6.52 7100.79,3440.92 7139.87,3480 ; v1(7280,4440) 7258.27,4418.27 ZET6.121 7258.27,4179.08 7204.38,4125.19 ; ZET6.62@7297.65,3382.66 7301.42,3378.9 7301.42,3324.66 7519.08,3107 v1(7871,3107) ; ZET6.62@7297.67,3382.68 7301.42,3386.42 7301.42,3424.7 7335.72,3459 ; v1(7300,4800) 7300,4820 7350,4870 C18.2 ; v1(7658,3358) 7519.17,3358 ZET6.72 7490.71,3386.46 7490.71,3424.7 7470,3445.41 7470,3459 ; v1(7762,3348) 7763,3347 7803.07,3347 C22.2 ; C19.2 7770.93,4491 7696,4491 7567.32,4362.32 ZET6.108 7563.54,4140.71 7485.52,4140.71 7470,4125.19 ; v1(7946,3366) 7963.93,3366 C23.2 ; C21.2 8086.06,3787.06 7971.05,3672.05 ZET6.84 7563.54,3675.83 7525.3,3675.83 7470,3731.13 ; C26.2 8302.94,4095.06 8262,4136 8140.93,4136 C20.2 8092.93,4088 8034.21,4088 7834.8,3888.58 ZET6.95 7563.54,3892.36 7525.3,3892.36 7470,3947.66 ; 7022.34,4140 7056.15,4140 7070.97,4125.19 7204.38,4125.19 ; 7204.38,4125.19 7470,4125.19 ; 7335.72,3459 7470,3459 ; 7470,3459 7470,3731.13 ; 7470,3731.13 7470,3947.66 ; 7470,3947.66 7470,4125.19
  Bottom Layer w10: v1(6260,4806) 6265,4801 v1(6265,4692) ; v1(6357,4555) 6357,4015 v1(6531,3841) ; v1(6363,3552) 6405.85,3552 6528.81,3429.03 6528.81,3398.19 v1(6572,3355) ; v1(6862,3308) 6866,3308 6915,3357 v1(6916,3480) ; v1(7010,4807) 7010,4582 7065,4527 v1(7060,4522) ; v1(7064,3011) 7064,3205 7098,3239 v2(7098,3263) ; v1(7280,4440) 7300,4460 v1(7300,4800) ; v1(7658,3358) 7668,3348 v1(7762,3348) ; v1(7871,3107) 7875,3107 7875,3295 v1(7946,3366)
VDDA: R5.2 ZET6.33
VREF+: R4.2 ZET6.32
VREF-: R6.1 ZET6.31
VSS_1: *.1 C1.1 C2.1 C3.1 C4.1 c5.1 C6.1 C7.1 C8.1 C9.1 C10.2 C11.2 C12.2 C13.1 C14.1 C15.1 C16.1 C17.2 C18.1 C19.1 C20.1 C21.1 C22.1 C23.1 C24.1 C25.1 C26.1 C27.2 D1.2 J1.26 J1.27 J1.28 J1.29 M1.1 P5.4 P5.6 P5.8 P5.10 P5.12 P5.14 P5.16 P5.18 P5.20 P6.2 P8.4 P9.12 P9.14 R1.2 R3.2 R6.2 S1.1 ZET6.16 ZET6.30 ZET6.38 ZET6.51 ZET6.61 ZET6.71 ZET6.83 ZET6.94 ZET6.107 ZET6.120 ZET6.130 ZET6.143 | length 15309.4
  Top Layer w10: v1(5903,3522) 5925.06,3499.94 C1.1 C2.1 C3.1 C4.1 ; v1(6092,5125) 6123,5156 C7.1 ; v1(6161,4758) 6186,4733 C24.1 ; v1(6333,4807) 6325,4807 6318.94,4800.94 C24.1 ; v1(6345,3517) 6511.93,3517 C15.1 6562.65,3567.72 6670.51,3567.72 6676.41,3573.62 ZET6.30 6694.44,3573.62 6666,3545.19 v2(6666,3535) ; R3.2 6319.93,4732 C24.1 ; C16.1 6793.06,3258.06 6825.2,3290.2 ZET6.38 6825.2,3444.8 v2(6822,3448) ; ZET6.16 6793.21,3849.21 v1(6797,3853) ; P5.4 P5.6 P5.8 P5.10 P5.12 P5.14 P5.16 P5.18 P5.20 7550,5105.9 7589.53,5066.37 7589.53,4952.53 7517.06,4880.06 C18.1 7440,4840 7420,4820 v1(7420,4800) ; ZET6.143 6825.2,4161.8 6826,4161 6827,4161 v1(6828,4162) ; C25.1 6988,2996 7006,3014 v1(7012,3014) ; v1(7009,3161) 7009,3181.79 7077.32,3250.11 7077.32,3332.68 7077,3333 7077,3340.33 7081.1,3344.44 ZET6.51@7081.1,3375.12 ; v1(7042,3458) 7044.02,3458 7081.1,3420.92 ZET6.51 ; v1(7080,4147) ZET6.130@7080,4180.18 ; ZET6.130@7080,4216.22 ZET6.130@7080,4180.18 ; v1(7101,4812) 7101,4809 7102,4809 C17.2 ; v1(7139,4147) 7142,4147 7123.02,4165.98 7094.2,4165.98 ZET6.130@7080,4180.18 ; v1@7277.95,3434.95 ZET6.61 7281.73,3378.9 7278.73,3364.96 7278.73,3337.08 7281.73,3323.14 7519.68,3085.19 7880.03,3085.19 7902.85,3108 v1(7928,3108) ; v1(7281,4149) 7281,4170 7276,4175 7276,4215.37 ZET6.120 7277.95,4400.38 7301.81,4424.24 7301.81,4441.81 v1(7340,4480) ; ZET6.71 7474.8,3342.2 7502,3315 ; v1(7492,3659) 7498.64,3652.36 ZET6.83 7983.36,3652.36 8077,3746 8170,3746 8211.06,3787.06 C21.1 ; v1(7492,3872) 7495.1,3868.9 ZET6.94 7848.9,3868.9 8037,4057 8151.93,4057 C20.1 8234.06,4053 8438.93,4053 C26.1 ; v1(7494,4103) 7507.28,4103 7529.08,4124.8 ZET6.107@7568.44,4124.8 ; ZET6.107 ZET6.107@7568.44,4124.8 ; v1(7591,3336) 7612,3315 7502,3315 ; C22.1 7681.07,3315 7502,3315 ; C19.1 7864.06,4510.06 7820,4466 7716,4466 7625,4375 7625,4144.24 7605.56,4124.8 ZET6.107@7568.44,4124.8 ; v1(8053.93,3364.07) 8053.93,3366 C23.1
  Bottom Layer w10: J1.29 J1.27 J1.28 J1.26 ; v1(5903,3522) 5903,3521 5909,3515 6344,3515 6345,3516 v1(6345,3517) ; v1(6092,5125) 6092,4827 v1(6161,4758) ; v1(6333,4807) 6461.19,4678.81 6461.19,4477.19 6569,4369.38 6569,3901 6621,3849 6793,3849 v1(6797,3853) 6841,3809 6841,3807 6842.62,3805.38 6842.62,3535 ; v2(6666,3535) 6842.62,3535 ; v2(6822,3448) 6875.81,3501.81 ; v1(6828,4162) 6887,4103 6987,4103 ; v1(7009,3161) 7009,3163 7011,3161 7011,3015 v1(7012,3014) ; v1(7080,4147) 7080,4509.34 7089.53,4518.87 7089.53,4800.53 v1(7101,4812) ; v1(7139,4147) 7132,4147 7088,4103 6987,4103 ; 7235,4103 7458,4103 ; v1(7281,4149) 7182,4050 7035,4050 6987,4098 6987,4103 ; v1(7340,4480) 7340,4500 7410.47,4570.47 7410.47,4766.37 7420,4775.9 v1(7420,4800) ; v1(7492,3659) 7485,3659 7482,3656 7461.5,3676.5 ; v1(7492,3872) 7491,3872 7461.5,3901.5 ; v1(7494,4103) 7458,4103 ; v1(7591,3336) 7591,3337 7461.5,3466.5 ; v1(7928,3108) 7928,3107 8053.93,3232.93 v1(8053.93,3364.07) ; 6842.62,3535 6875.81,3501.81 ; 6875.81,3501.81 6925.03,3501.81 6960.35,3466.5 7461.5,3466.5 ; 7458,4103 7458,3905 7461.5,3901.5 ; 7461.5,3466.5 7461.5,3676.5 ; 7461.5,3676.5 7461.5,3901.5
  other v1: 7283.06,3437.19
pads on no net: K1.2 K1.4 K1.5 K1.6 M1.9 M1.10 M1.11 M1.12 M1.15 P5.11 P5.17 P5.19 P8.5 P8.6 S1.3 S1.4 Y1. Y3. ZET6.6 ZET6.106

## Text inside footprints (layer, text, board x,y; h text height)
*: Top Overlay "3" at 8028.03,1394.94 h50; Top Overlay "1" at 7848.03,1394.94 h50
D1: Top Overlay "+" at 8651.79,1577.73 h59.06 r90
J1: Top Overlay "2" at 5430,5050 h50 r270; Top Overlay "1" at 5330,5050 h50 r270; Top Overlay "49" at 5330,2470 h50 r270; Top Overlay "50" at 5430,2470 h50 r270
J2: Top Overlay "2" at 8880,5050 h50 r270; Top Overlay "1" at 8780,5050 h50 r270; Top Overlay "49" at 8780,2470 h50 r270; Top Overlay "50" at 8880,2470 h50 r270
P3: Top Overlay "20" at 7610,4730 h50; Top Overlay "19" at 7610,4630 h50; Top Overlay "1" at 6550,4630 h50; Top Overlay "2" at 6550,4730 h50
P5: Top Overlay "20" at 7610,5130 h50; Top Overlay "19" at 7610,5030 h50; Top Overlay "1" at 6550,5030 h50; Top Overlay "2" at 6550,5130 h50
P9: Top Overlay "2" at 7490,2400 h50 r90; Top Overlay "1" at 7490,2710 h50 r90; Top Overlay "14" at 6780,2550 h50 r180; Top Overlay "13" at 6780,2650 h50 r180